# Altium PCB shield_template.PcbDoc
Units mm, origin at the board's own origin, x right, y up, seen from the top; angles counter-clockwise.
Board outline 20.5 x 25 mm, 2 copper layers (Top Layer, Bottom Layer); 2 components, 13 nets, 16 pads, 0 vias.
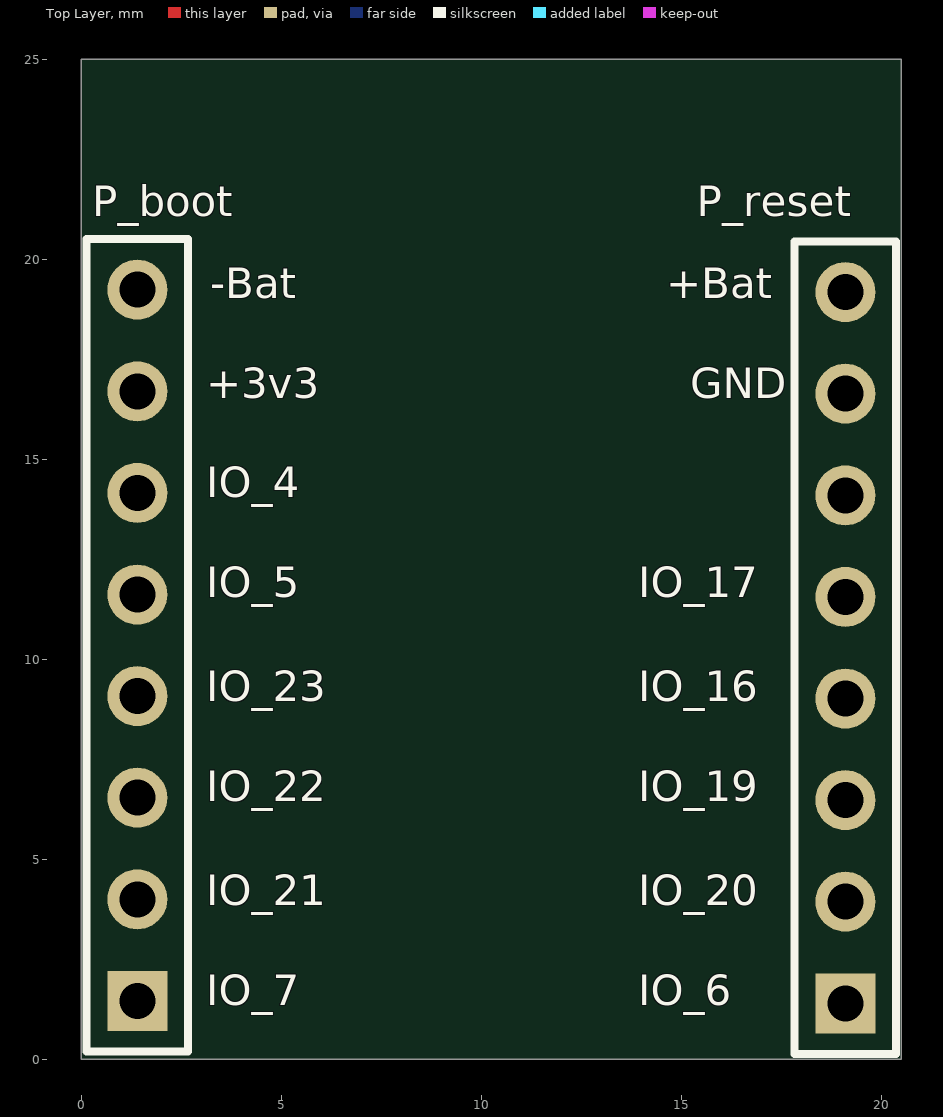
[diagram p0: Top Layer view]
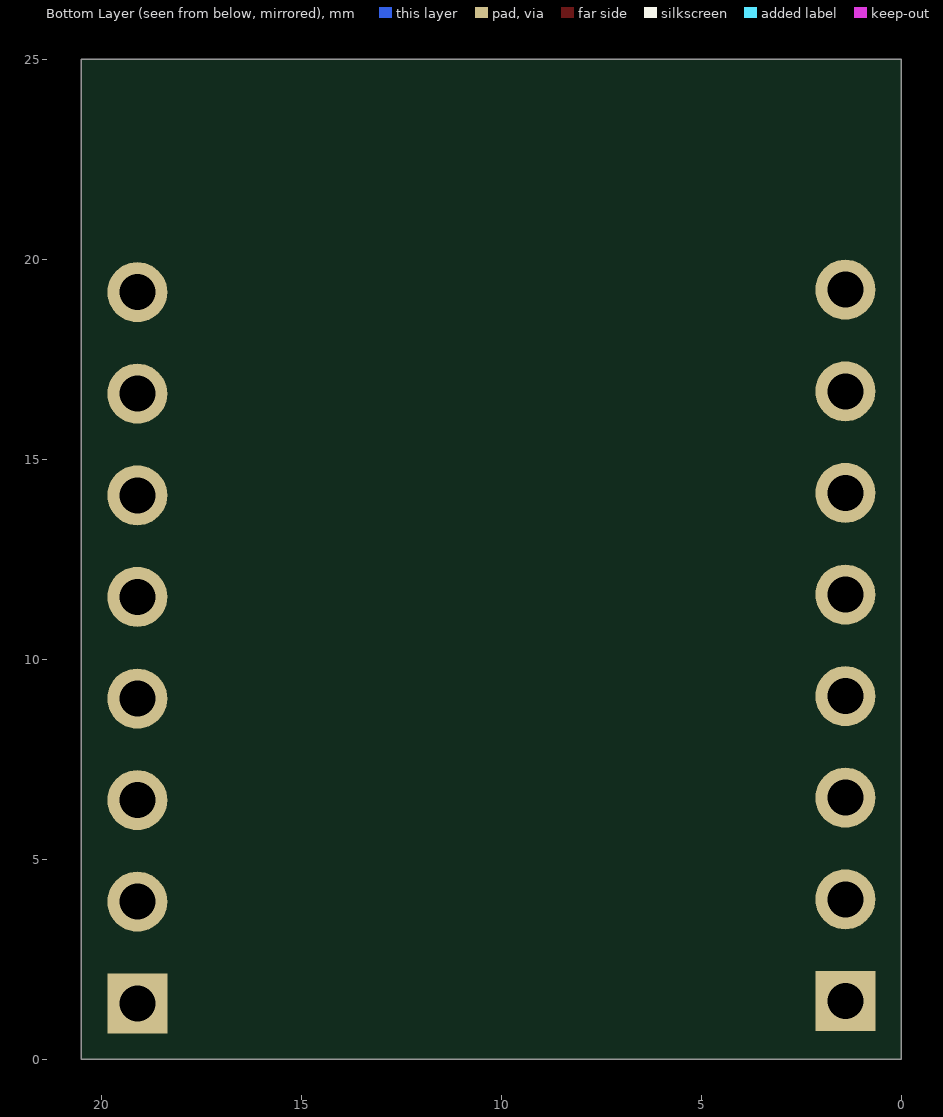
[diagram p1: Bottom Layer view, seen from below]

## Layer stack, top to bottom
Top Solder: solder mask 0.0102, Solder Resist, Dk 3.5
Top Layer: signal copper 0.0356
Dielectric 1: dielectric 0.32, FR-4, Dk 4.8
Bottom Layer: signal copper 0.0356
Bottom Solder: solder mask 0.0102, Solder Resist, Dk 3.5

## Board outline
0,0 0,25 20.5,25 20.5,0

## Design rules (kind name [scope] priority, off if disabled: settings)
Clearance [All] p1: gap=0.254 ignorepadtopadclearanceinfootprint=FALSE
PolygonConnect [All] p1: connectstyle=Relief reliefconductorwidth=0.254 reliefentries=4 polygonreliefangle="90 Angle" airgapwidth=0.254
RoutingVias [All] p1: holewidth=0.711 width=1.27 viastyle="Through Hole" minholewidth=0.711 minwidth=1.27 maxholewidth=0.711 maxwidth=1.27
SolderMaskExpansion [All] p1: expansion=0.102 istentingtop=FALSE
SupplyNets "Schematic Supply Nets_1" [InNet('GND')] p1: voltage=0.000
SupplyNets "Schematic Supply Nets" [InNet('+3v3')] p2: voltage=0.000
Width [All] p1: maxlimit=0.254 minlimit=0.254 preferedwidth=0.254
30 further rules are at their usual default settings.

## Components (designator, comment, footprint, x,y, rotation, side; value= is the part's Value field where it differs from the comment)
P_boot "Header 8" HDR1X8 1.4,1.46 r90 top locked
P_reset "Header 8" HDR1X8 19.1,1.4 r90 top locked

## Footprints (in the part's own frame and the unit in brackets; to place one, negate y for a bottom-side part, rotate by r counter-clockwise, add the part's x,y. Pads: shape width x height; smd on the part's side, far side on the other; paste and mask are expansions set on the pad)
HDR1X8 [mm] "Connector; Header; 8 Position"
  rect 1.5x1.5 hole 0.9: 1(0,0)
  round 1.5 hole 0.9: 2(2.54,0) 3(5.08,0) 4(7.62,0) 5(10.16,0) 6(12.7,0) 7(15.24,0) 8(17.78,0)
  silkscreen extent -1.27,-1.27 19.05,1.27

## Part data
P_boot P_reset: "Header, 8-Pin", LatestRevisionDate=17-Jul-2002, LatestRevisionNote="Re-released for DXP Platform.", Publisher="Altium Limited"

## Nets (pads, with @x,y where several pads share a name; then routed paths per layer and width w, separated by ;. In a path a pad name is that pad's centre, name@x,y a point inside that pad or via, vN(x,y) a via of type N, cw(c..) or ccw(c..) an arc to the next point about the centre after c; other vN are vias at no path point)
+3v3: P_boot.7
GND: P_reset.2
NetP_boot_1: P_boot.1
NetP_boot_2: P_boot.2
NetP_boot_3: P_boot.3
NetP_boot_4: P_boot.4
NetP_boot_5: P_boot.5
NetP_boot_6: P_boot.6
NetP_reset_4: P_reset.4
NetP_reset_5: P_reset.5
NetP_reset_6: P_reset.6
NetP_reset_7: P_reset.7
NetP_reset_8: P_reset.8
pads on no net: P_boot.8 P_reset.1 P_reset.3

## Silkscreen, mask and mechanical layers (free items; w line width, h text height)
Top Overlay:
  text "-Bat" at 3.227,19.027 h0.76
  text "+Bat" at 14.627,19.027 h0.76
  text "+3v3" at 3.127,16.527 h0.76
  text "GND" at 15.227,16.527 h0.76
  text "IO_4" at 3.127,14.054 h0.76
  text "IO_5" at 3.127,11.554 h0.76
  text "IO_17" at 13.927,11.554 h0.76
  text "IO_23" at 3.127,8.954 h0.76
  text "IO_16" at 13.927,8.954 h0.76
  text "IO_22" at 3.127,6.454 h0.76
  text "IO_19" at 13.927,6.454 h0.76
  text "IO_21" at 3.127,3.854 h0.76
  text "IO_20" at 13.927,3.854 h0.76
  text "IO_7" at 3.127,1.354 h0.76
  text "IO_6" at 13.927,1.354 h0.76